# EAGLE board hopperBoard (EAGLE 9.5.0)
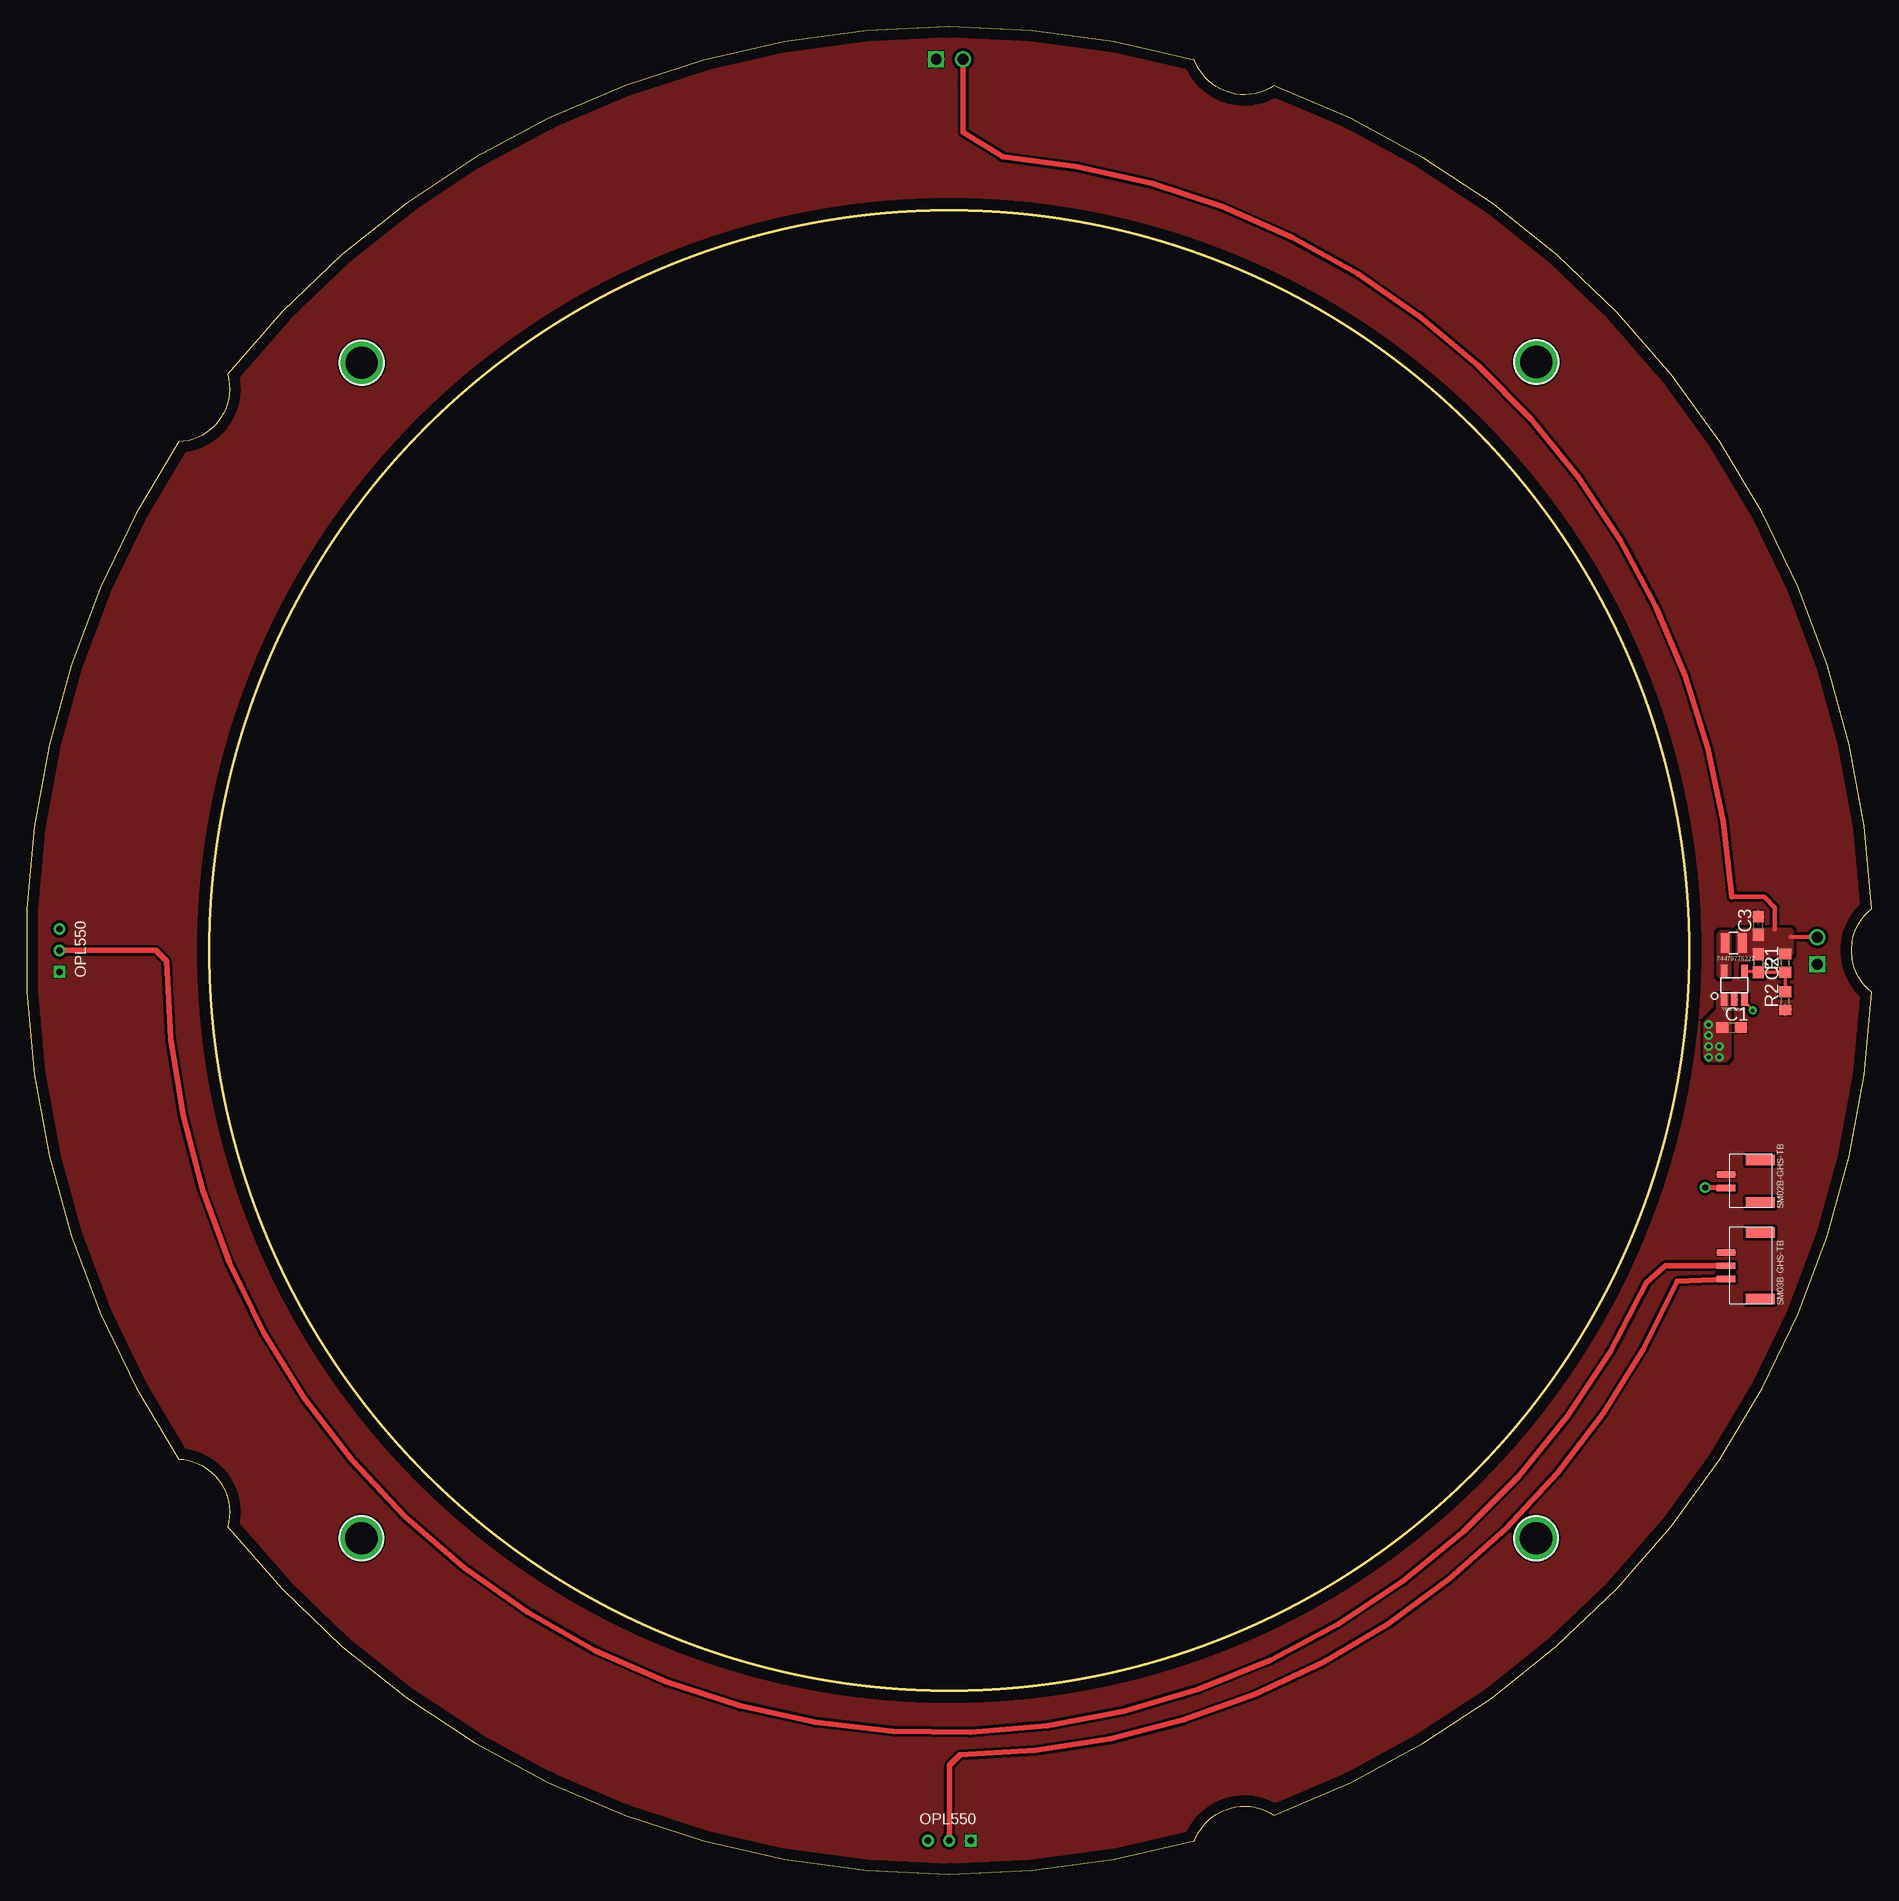
[diagram p0: board, top side]
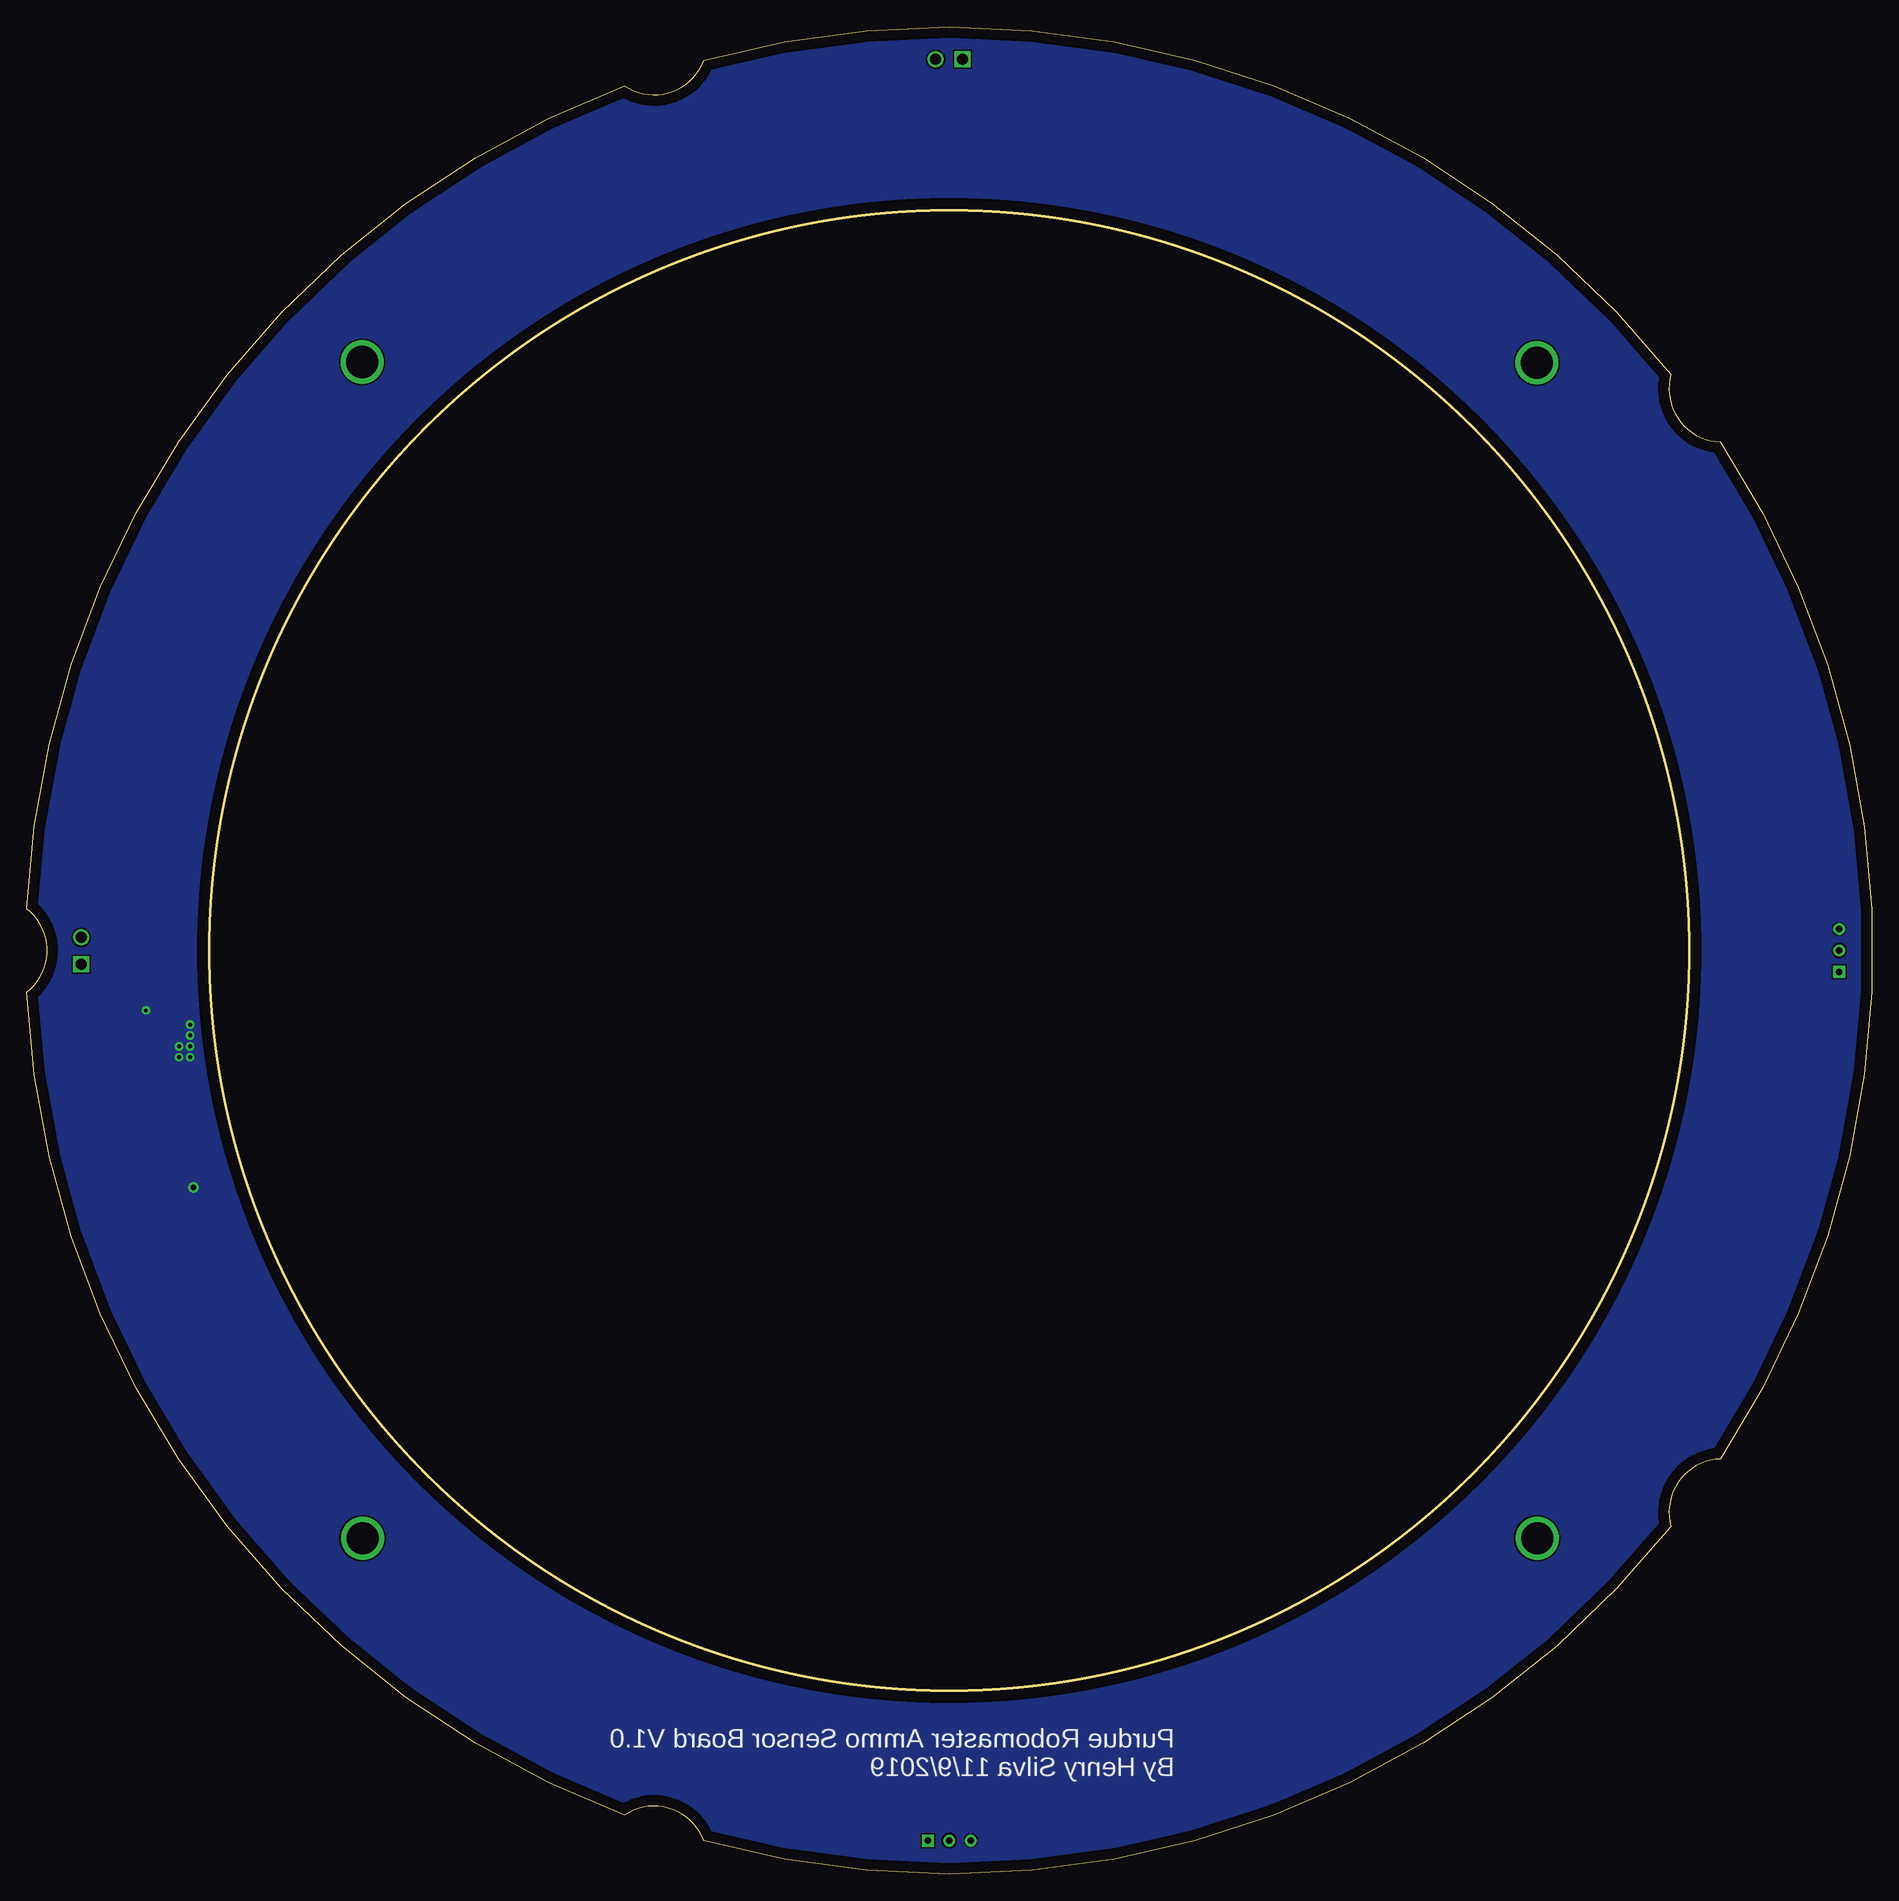
[diagram p1: board, bottom side, seen from below]

Size 172.09 x 172.26 mm. Coordinates in mm from the lower left corner, seen from the top.
Outline: 116.33,166.76 arc-104 108.93,169.16
Outline: 108.93,169.16 arc67 18.72,139.85
Outline: 18.72,139.85 arc-104 14.15,133.56
Outline: 14.15,133.56 arc67 14.15,38.71
Outline: 14.15,38.71 arc-104 18.72,32.41
Outline: 18.72,32.41 arc67 108.93,3.1
Outline: 108.93,3.1 arc-104 116.33,5.5
Outline: 116.33,5.5 arc67 172.09,82.24
Outline: 172.09,82.24 arc-104 172.09,90.02
Outline: 18.72,139.85 arc-104 14.15,133.56
Outline: 14.15,133.56 arc67 14.15,38.71
Outline: 14.15,38.71 arc-104 18.72,32.41
Outline: 18.72,32.41 arc67 108.93,3.1
Outline: 108.93,3.1 arc-104 116.33,5.5
Outline: 116.33,5.5 arc67 172.09,82.24
Outline: 172.09,82.24 arc-104 172.09,90.02
Outline: 172.09,90.02 arc67 116.33,166.76
Outline: 116.33,166.76 arc-104 108.93,169.16
Outline: circle at 86.04,86.13 radius 69.01
Copper layers (1*16): Top 0.035mm / dielectric 1.5mm / Bottom 0.035mm
Design rules "default *": minimum track width 6mil, minimum drill 0.35mm, track to track 6mil, track to pad 6mil, pad to pad 6mil, via to via 6mil, smd to smd 6mil, copper to edge 40mil, drill to drill 6mil, minimum pad ring 10mil, minimum via ring 8mil, stop-mask expansion 4mil, vias tented up to drill 22mil, thermal gap 5mil

## Footprints (pad centres in the part's own frame; a part is rotated, then mirrored left to right if it is on the bottom)
C0603 = smd 1.1 x 1: 1 -0.85,0; 2 0.85,0
R0603 = smd 1 x 1.1: 1 -0.85,0; 2 0.85,0
2PIN = drill 1 square: P$1 0,0 | drill 1: P$2 2.5,0
OPL550 = drill 0.6 square: P$1 0,0 | drill 0.6: P$2 2,0; P$3 4,0
TPS62260 = smd 0.6 x 1.1: P$1 0.3,0.6; P$2 1.25,0.6; P$3 2.2,0.6; P$4 2.2,3.3; P$5 0.3,3.3
SM02B-GHS-TB = smd 1 x 2.7: P$1 0.5,1.35; P$2 4.45,1.35 | smd 0.6 x 1.7: P$3 1.85,4.55; P$4 3.1,4.55
MOUNTINGHOLE_3.0_PLATEDTHIN = drill 3 pad 3.6: P$1 0,0
SM03B-GHS-TB = smd 1 x 2.7: P$1 0.5,1.35; P$2 6.7,1.35 | smd 0.6 x 1.7: P$3 2.35,4.55; P$4 3.6,4.55; P$5 4.85,4.55
74479776222 = smd 0.8 x 1.8: P$1 0.4,0.9; P$2 2,0.9

## Placement (x,y rotation side)
C1  4.7uF  [C0603]  159.01,78.94 0 top
C2  22pF  [C0603]  161.51,84.94 270 top
C3  10uF  [C0603]  161.51,88.44 90 top
R1  330k  [R0603]  164.01,84.94 90 top
R2  180k  [R0603]  164.01,81.44 90 top
U$1  2PIN  [2PIN]  167.01,84.85 90 top
U$2  2PIN  [2PIN]  84.82,169.23 0 top
U$3  OPL550  [OPL550]  88.04,3.13 180 top
U$4  OPL550  [OPL550]  3.04,84.13 90 top
U$5  TPS62260  [TPS62260]  158.01,80.94 0 top
U$6  SM02B-GHS-TB  [SM02B-GHS-TB]  163.04,62.13 90 top
U$7  MOUNTINGHOLE3.0THIN  [MOUNTINGHOLE_3.0_PLATEDTHIN]  140.81,141 0 top
U$8  SM03B-GHS-TB  [SM03B-GHS-TB]  163.04,53.13 90 top
U$9  2.2uH  [74479776222]  158.01,85.94 0 top
U$10  MOUNTINGHOLE3.0THIN  [MOUNTINGHOLE_3.0_PLATEDTHIN]  140.77,31.32 0 top
U$11  MOUNTINGHOLE3.0THIN  [MOUNTINGHOLE_3.0_PLATEDTHIN]  31.2,31.32 0 top
U$12  MOUNTINGHOLE3.0THIN  [MOUNTINGHOLE_3.0_PLATEDTHIN]  31.23,140.94 0 top

## Library data of the parts
C1-C3 = rcl; SPICEPREFIX: C
R1 R2 = rcl; SPICEPREFIX: R
U$1-U$6 U$8 U$9 = _HenrySilva
U$7 U$10-U$12 = microbuilder

## Nets
1.5V: C2.1 C3.1 R1.2 U$1.P$2 U$2.P$2 U$9.P$2
5V: C1.1 U$3.P$3 U$4.P$3 U$5.P$1 U$5.P$3 U$6.P$3
AMMO1: U$4.P$2 U$8.P$4
AMMO2: U$3.P$2 U$8.P$3
GND: C1.2 C3.2 R2.1 U$1.P$1 U$2.P$1 U$3.P$1 U$4.P$1 U$5.P$2 U$6.P$4 U$8.P$5
N$1: U$5.P$5 U$9.P$1
N$4: C2.2 R1.1 R2.2 U$5.P$4

## Tracks (layer width: path | path; a pad name or v marks a point on that pad's centre or on a via)
1.5V
  Top 0.406: U$1.P$2 164.53,87.4 | 163.04,88.13 163.04,90.13 162.04,91.13 159.04,91.13
  Top 0.508: U$2.P$2 87.31,166.65 87.34,162.43 91.04,160.13 arc-81 159.04,91.13
  pour Top (no thermals): 159.45,85.88 159.7,85.62 164.53,85.62 164.78,85.88 164.78,87.91 164.53,88.16 159.7,88.16 159.45,87.91
5V  (via drill 0.35, 0.38, 0.55)
  Top 0.203: v160.97,80.54 U$5.P$3
  Top 0.508: U$6.P$3 v156.54,64.03
  other vias: 156.86,79.22 156.86,78.21 156.86,77.19 157.87,77.19 157.87,76.17 156.86,76.17
  pour Bottom: -3.96,86.13 -3.96,176.13 176.04,176.13 176.04,-3.87 -3.96,-3.87
  pour Top (no thermals): 158.69,82.07 158.69,80.44 158.89,80.24 158.89,76.17 158.48,75.77 156.86,75.77 156.45,76.17 156.45,79.42 157.67,80.64 157.67,81.86 157.87,82.07
AMMO1
  Top 0.508: U$8.P$4 152.84,56.73 151.04,55.13 arc-155 13.04,85.13 12.04,86.13 U$4.P$2
AMMO2
  Top 0.508: U$8.P$3 153.95,55.27 arc-65 87.04,11.13 86.04,10.13 U$3.P$2
GND
  pour Top (isolate 0.254, rank 2): 86.04,174.13 174.04,174.13 174.04,86.13 174.04,-1.87 86.04,-1.87 -1.96,-1.87 -1.96,86.13 -1.96,174.13
N$1
  pour Top (no thermals): 158.94,83.84 158.94,87.65 158.69,87.91 157.93,87.91 157.67,87.65 157.67,83.84 157.93,83.59 158.69,83.59
N$4
  Top 0.305: R2.2 R1.1 C2.2 U$5.P$4

## Text on the board
bNames: Purdue Robomaster Ammo Sensor Board V1.0 / By Henry Silva 11/9/2019